# EAGLE board E-book_Reader (EAGLE 9.7.0)
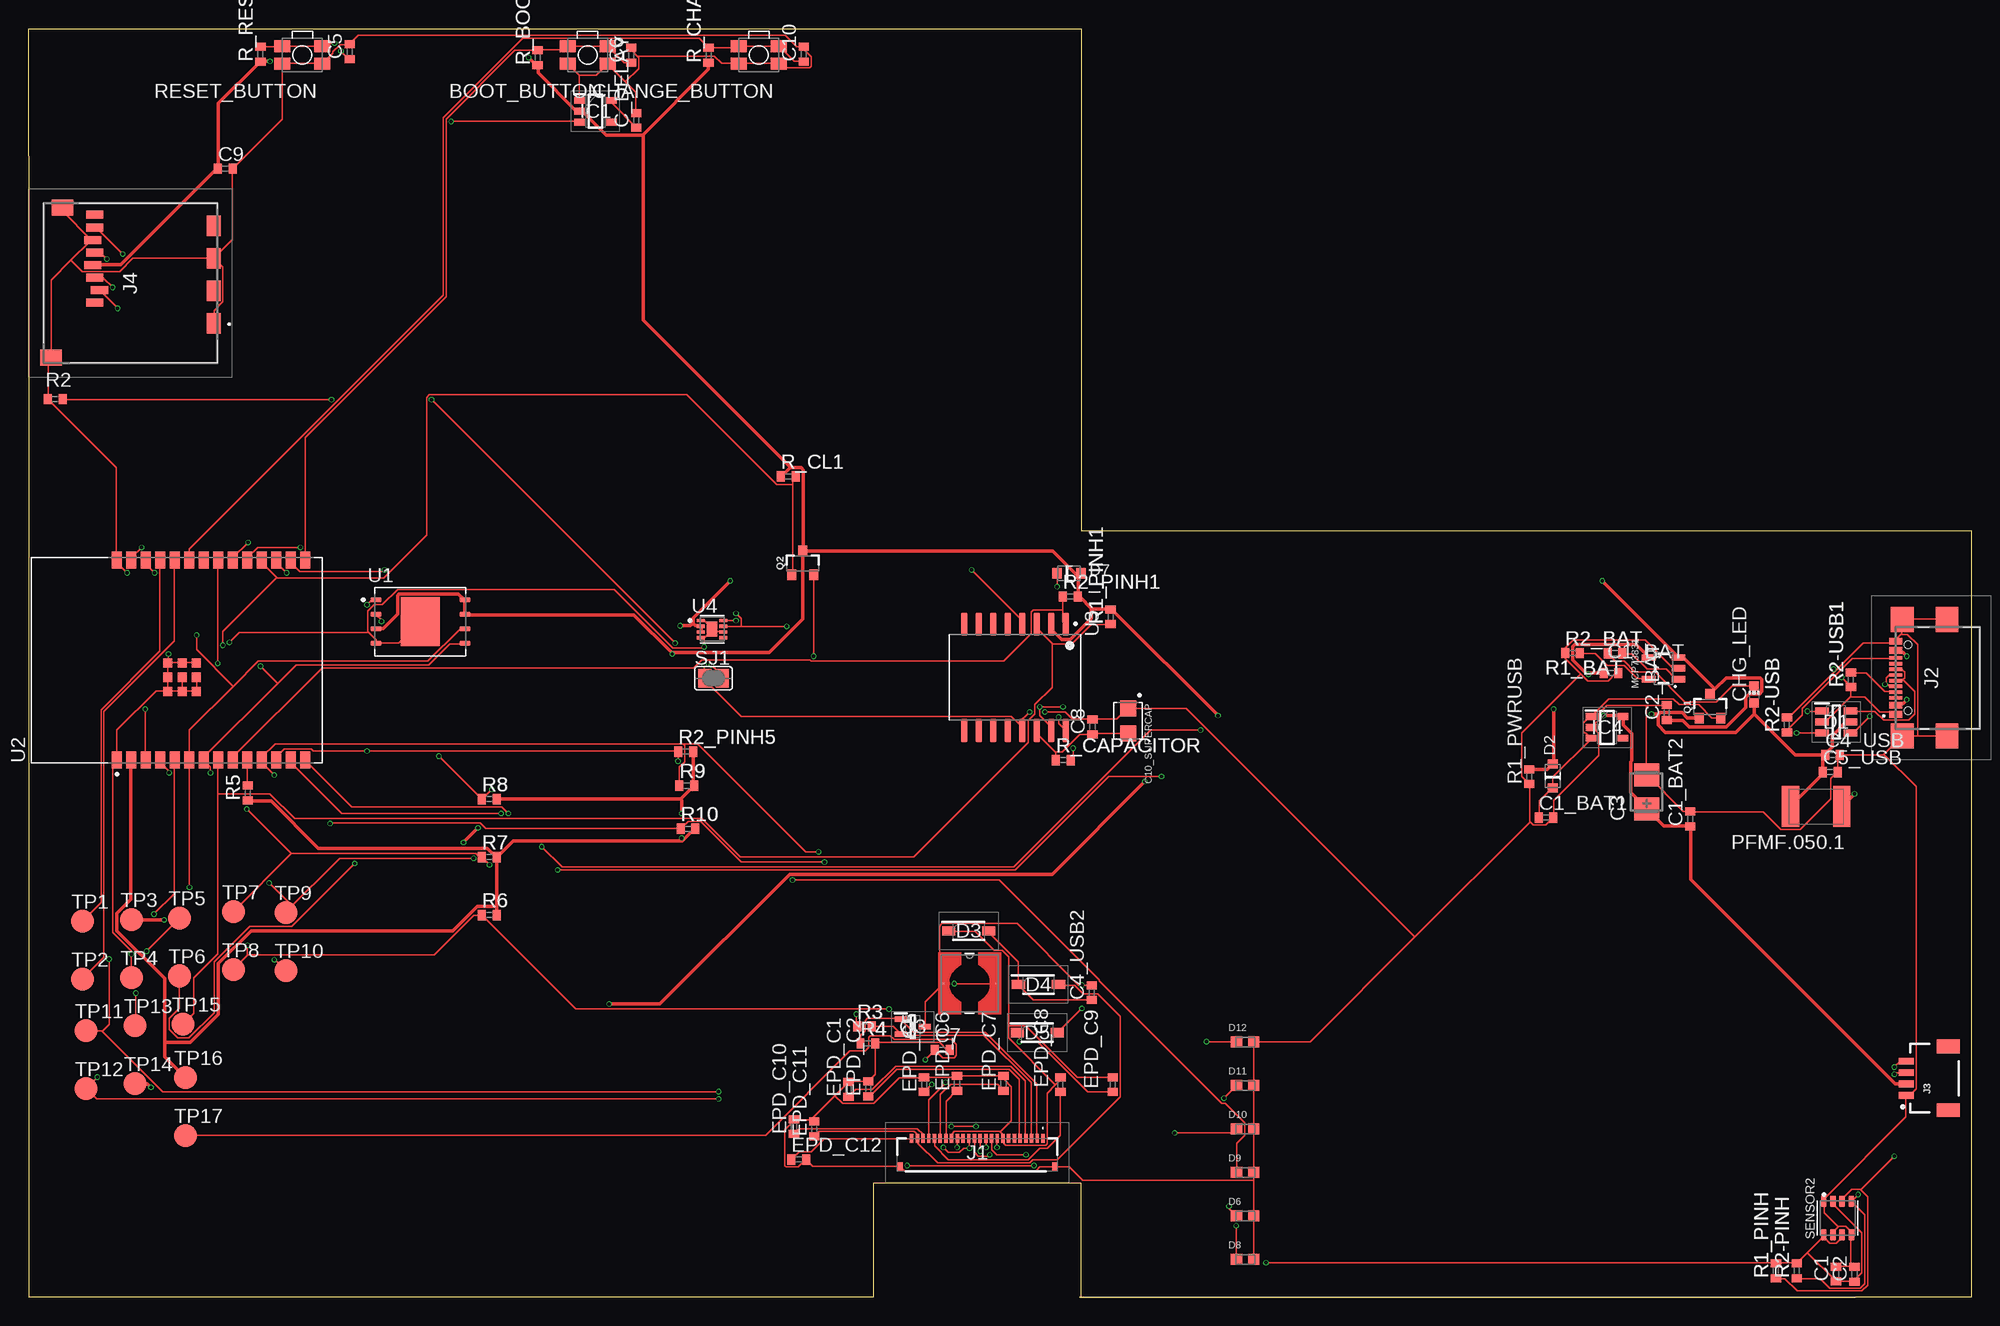
[diagram p0: board, top side]
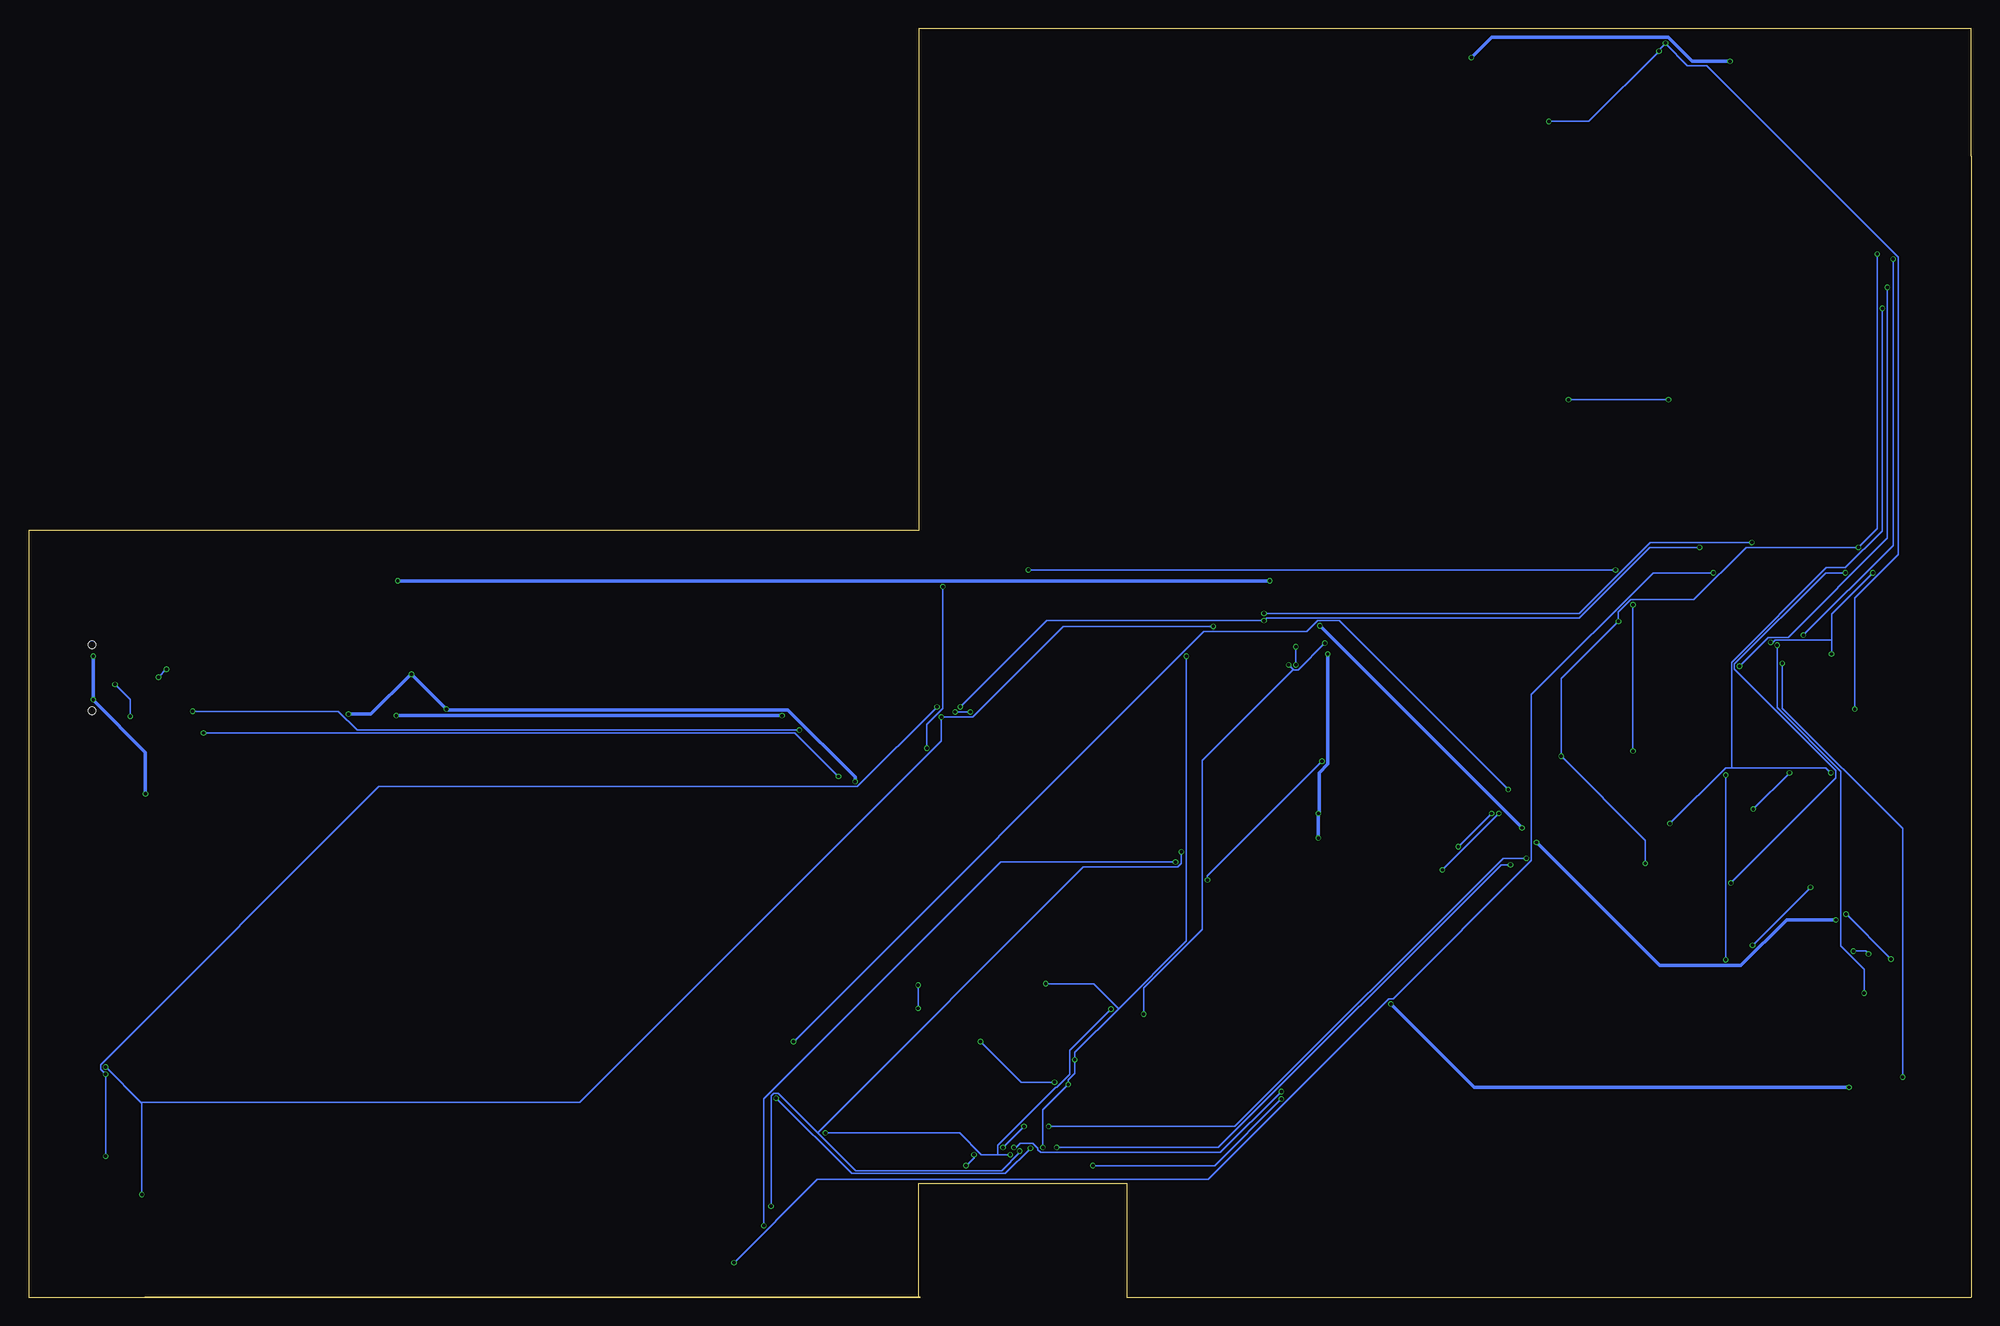
[diagram p1: board, bottom side, seen from below]

Size 170.2 x 111.2 mm. Coordinates in mm from the lower left corner, seen from the top.
Outline: 92.1,0 160,0
Outline: 92.1,0 170.2,0 170.2,67.2 92.2,67.2 92.2,111.2 0,111.2 0,100 0,0 74,0 74,10 92.2,10 92.2,0.1 92.1,0
Copper layers (1*16): Top 0.035mm / dielectric 1.6mm / Bottom 0.035mm
Design rules "jlcpcb-2layers.dru": minimum track width 5mil, minimum drill 0.3mm, track to track 5mil, track to pad 5mil, pad to pad 5mil, via to via 5mil, smd to smd 5mil, copper to edge 0.2mm, drill to drill 6mil, minimum pad ring 10mil, minimum via ring 3mil, stop-mask expansion 4mil, vias tented up to drill 0mil, thermal gap 10mil
Net classes: 1 power: width 0.3 mm

## Footprints (pad centres in the part's own frame; a part is rotated, then mirrored left to right if it is on the bottom)
MYBUTTON = smd 1.4 x 1.05: 1 1.75,0.75; 2 -1.75,0.75; 3 -1.75,-0.75; 4 1.75,-0.75
EAGLE-LTSPICE_C0402 = smd 0.7 x 0.9: 1 -0.65,0; 2 0.65,0
RCL_CT3528 = smd 2 x 2.2: + -1.5,0; - 1.5,0
CAPCP3225X100N = smd 1.4 x 1.4: 1 -1.1,0; 2 1.1,0
ADAFRUIT_CHIP-LED0603 = smd 0.8 x 0.8: A 0,-0.75; C 0,0.75
SOT95P280X145-6N = smd 1.2 x 0.6: 1 -1.25,0.95; 2 -1.25,0; 3 -1.25,-0.95; 4 1.25,-0.95; 5 1.25,0; 6 1.25,0.95
ESP32_WROVER_AVX---SD0805S020S1R0_AVX_SD0805S020S1R0_0 = smd 0.8 x 0.9: 1 -1.05,0; 2 1.05,0
SOD3716X135N = smd 1.15 x 0.8: 1 -1.75,0; 2 1.75,0
DIOC1608X36N = smd 0.97 x 0.94: 1 -0.75,0; 2 0.75,0
SOT95P280X125-5N = smd 0.9 x 0.6: 1 -1.4,0.95; 2 -1.4,0; 3 -1.4,-0.95; 4 1.4,-0.95; 5 1.4,0.95
SOT95P280X120-5N = smd 0.9 x 0.6: 1 -1.4,0.95; 2 -1.4,0; 3 -1.4,-0.95; 4 1.4,-0.95; 5 1.4,0.95
FH34SRJ24S05SH99 = smd 0.3 x 0.8: 1 5.75,1.45; 2 5.25,1.45; 3 4.75,1.45; 4 4.25,1.45; 5 3.75,1.45; 6 3.25,1.45; 7 2.75,1.45; 8 2.25,1.45; 9 1.75,1.45; 10 1.25,1.45; 11 0.75,1.45; 12 0.25,1.45; 13 -0.25,1.45; 14 -0.75,1.45; 15 -1.25,1.45; 16 -1.75,1.45; 17 -2.25,1.45; 18 -2.75,1.45; 19 -3.25,1.45; 20 -3.75,1.45; 21 -4.25,1.45; 22 -4.75,1.45; 23 -5.25,1.45; 24 -5.75,1.45 | smd 0.4 x 0.8: MP1 6.75,-1.05; MP2 -6.75,-1.05
SAMACSYS_PARTS_USB4110GFA = smd 0.3 x 1.15: A1 -3.35,3.678; A4 -2.55,3.678; A5 -1.25,3.678; A6 -0.25,3.678; A7 0.25,3.678; A8 1.25,3.678; A9 2.55,3.678; A12 3.35,3.678; B1 3.05,3.678; B4 2.25,3.678; B5 1.75,3.678; B6 0.75,3.678; B7 -0.75,3.678; B8 -1.75,3.678; B9 -2.25,3.678; B12 -3.05,3.678 | smd 2.18 x 2: MP1 -5.11,-0.827; MP2 5.11,-0.827; MP3 -5.11,3.103; MP4 5.11,3.103 | hole 0.65: -2.89,2.603; 2.89,2.603
JST04_1MM_RA = smd 0.6 x 1.35: 1 -1.5,0; 2 -0.5,0; 3 0.5,0; 4 1.5,0 | smd 1.2 x 2: NC1 2.8,-3.675; NC2 -2.8,-3.675
112ATAARR03ATTEND = smd 1.8 x 1.2: G1 10.6,10.4; G2 4.9,10.4; S1 7.75,10.4; S2 2.05,10.4 | smd 1.4 x 1.9: G3 13.6,-3.85; G4 0.45,-2.85 | smd 0.7 x 1.5: P1 8.8,0; P2 7.7,0.4; P3 6.6,0; P4 5.5,-0.2; P5 4.4,0; P6 3.3,-0.2; P7 2.2,0; P8 1.1,0
IND_4828-WE-TPC_WRE = smd 0.127 x 0.127: 1 -2.286,0; 2 2.286,0
ESP32_WROVER_SPARKFUN-IC-POWER_SOT23-5 = smd 0.55 x 1.2: 1 -0.95,-1.3; 2 0,-1.3; 3 0.95,-1.3; 4 0.95,1.3; 5 -0.95,1.3
ESP32C6_VARISTOR_CT/CN1812 = smd 1.5 x 3.6: 1 -2.25,0; 2 2.25,0
ESP32_WROVER_SPARKFUN-DISCRETESEMI_SOT23-3 = smd 0.8 x 0.9: 1 -0.95,-1; 2 0.95,-1; 3 0,1.1
SOT65P210X110-3N = smd 1.05 x 0.5: 1 -1.05,0.65; 2 -1.05,-0.65; 3 1.05,0
ESP32_WROVER_EAGLE-LTSPICE_R0402 = smd 0.7 x 0.9: 1 -0.65,0; 2 0.65,0
ESP32_WROVER_BME680_PSON80P300X300X100-8N = smd 1.016 x 0.5: 1 1.458,1.2; 2 1.458,0.4; 3 1.458,-0.4; 4 1.458,-1.2; 5 -1.458,-1.22; 6 -1.458,-0.4; 7 -1.458,0.4; 8 -1.458,1.2
SJ = smd 1.168 x 1.6: 1 -0.762,0; 2 0.762,0
TP20R = smd 2 x 2: TP 0,0
SON127P600X800X80-9N = smd 0.94 x 0.44: 1 -3.895,1.905; 2 -3.895,0.635; 3 -3.895,-0.635; 4 -3.895,-1.905; 5 3.895,-1.905; 6 3.895,-0.635; 7 3.895,0.635; 8 3.895,1.905 | smd 3.4 x 4.3: 9 0,0
XCVR_ESP32-C6-WROOM-1-N8 = smd 1.5 x 0.9: 1 -8.75,5.26; 2 -8.75,3.99; 3 -8.75,2.72; 4 -8.75,1.45; 5 -8.75,0.18; 6 -8.75,-1.09; 7 -8.75,-2.36; 8 -8.75,-3.63; 9 -8.75,-4.9; 10 -8.75,-6.17; 11 -8.75,-7.44; 12 -8.75,-8.71; 13 -8.75,-9.98; 14 -8.75,-11.25; 15 8.75,-11.25; 16 8.75,-9.98; 17 8.75,-8.71; 18 8.75,-7.44; 19 8.75,-6.17; 20 8.75,-4.9; 21 8.75,-3.63; 22 8.75,-2.36; 23 8.75,-1.09; 24 8.75,0.18; 25 8.75,1.45; 26 8.75,2.72; 27 8.75,3.99; 28 8.75,5.26 | smd 0.8 x 0.8: 29_1 -2.755,0.79; 29_2 -1.505,0.79; 29_3 -0.255,0.79; 29_4 -2.755,-0.46; 29_5 -1.505,-0.46; 29_6 -0.255,-0.46; 29_7 -2.755,-1.71; 29_8 -1.505,-1.71; 29_9 -0.255,-1.71
SOIC127P1032X265-16N = smd 2.05 x 0.59: 1 -4.655,4.445; 2 -4.655,3.175; 3 -4.655,1.905; 4 -4.655,0.635; 5 -4.655,-0.635; 6 -4.655,-1.905; 7 -4.655,-3.175; 8 -4.655,-4.445; 9 4.655,-4.445; 10 4.655,-3.175; 11 4.655,-1.905; 12 4.655,-0.635; 13 4.655,0.635; 14 4.655,1.905; 15 4.655,3.175; 16 4.655,4.445
SON50P200X200X80-9N = smd 0.76 x 0.27: 1 -0.985,0.75; 2 -0.985,0.25; 3 -0.985,-0.25; 4 -0.985,-0.75; 5 0.985,-0.75; 6 0.985,-0.25; 7 0.985,0.25; 8 0.985,0.75 | smd 0.9 x 1.3: 9 0,0

## Placement (x,y rotation side)
BOOT_BUTTON  BUTTON_CUSYOMV1  [MYBUTTON]  48.98,108.88 180 top
C1  100nF  [EAGLE-LTSPICE_C0402]  158.33,2.05 90 top
C1_BAT  4.7uF  [EAGLE-LTSPICE_C0402]  138.63,54.73 0 top
C1_BAT1  4.7uF  [EAGLE-LTSPICE_C0402]  132.93,42.05 0 top
C1_BAT2  4.7uF  [EAGLE-LTSPICE_C0402]  145.56,41.93 90 top
C2  100nF  [EAGLE-LTSPICE_C0402]  159.95,2.04 90 top
C2_BAT  4.7uF  [EAGLE-LTSPICE_C0402]  143.51,51.25 90 top
C3  100uF TANT  [RCL_CT3528]  141.74,44.3 90 top
C4_USB  100NF  [EAGLE-LTSPICE_C0402]  158.03,47.55 0 top
C4_USB2  4.7uF/25V  [EAGLE-LTSPICE_C0402]  93.13,26.71 90 top
C5  1uF  [EAGLE-LTSPICE_C0402]  28.13,109.16 90 top
C5_USB  4.7uF  [EAGLE-LTSPICE_C0402]  157.83,46.04 0 top
C6  100nF  [EAGLE-LTSPICE_C0402]  52.79,108.85 90 top
C7  10uF  [EAGLE-LTSPICE_C0402]  80.03,21.69 0 top
C8  100nF  [EAGLE-LTSPICE_C0402]  93.2,50 90 top
C9  100nF  [EAGLE-LTSPICE_C0402]  17.23,98.91 0 top
C10  100nF  [EAGLE-LTSPICE_C0402]  67.91,108.95 90 top
C10_SUPERCAP  CPH3225A  [CAPCP3225X100N]  96.32,50.53 270 top
C_DELAY  100nF  [EAGLE-LTSPICE_C0402]  53.23,103.15 90 top
CHANGE_BUTTON  BUTTON_CUSYOMV1  [MYBUTTON]  63.98,108.88 180 top
CHG_LED  [ADAFRUIT_CHIP-LED0603]  151.15,52.85 0 top
D1  USBLC6-2SC6Y  [SOT95P280X145-6N]  158.35,50.43 0 top
D2  ESP32_WROVER_AVX---SD0805S020S1R0_AVX_SD0805S020S1R0_0_0AVX_SD0805S020S1R0_0_0  [ESP32_WROVER_AVX---SD0805S020S1R0_AVX_SD0805S020S1R0_0]  133.53,45.71 90 top
D3  MBR0530  [SOD3716X135N]  82.37,32.13 0 top
D4  MBR0530  [SOD3716X135N]  88.47,27.42 0 top
D5  MBR0530  [SOD3716X135N]  88.37,23.21 0 top
D6  PGB1010603MR  [DIOC1608X36N]  106.57,7.15 0 top
D7  ESP32_WROVER_AVX---SD0805S020S1R0_AVX_SD0805S020S1R0_0_0AVX_SD0805S020S1R0_0_0  [ESP32_WROVER_AVX---SD0805S020S1R0_AVX_SD0805S020S1R0_0]  91.14,63.46 0 top
D8  PGB1010603MR  [DIOC1608X36N]  106.57,3.34 0 top
D9  PGB1010603MR  [DIOC1608X36N]  106.57,10.96 0 top
D10  PGB1010603MR  [DIOC1608X36N]  106.57,14.77 0 top
D11  PGB1010603MR  [DIOC1608X36N]  106.57,18.58 0 top
D12  PGB1010603MR  [DIOC1608X36N]  106.57,22.39 0 top
EPD_C1  1uF/50V  [EAGLE-LTSPICE_C0402]  71.83,18.25 90 top
EPD_C2  1uF/50V  [EAGLE-LTSPICE_C0402]  73.55,18.29 90 top
EPD_C5  1uF/50V  [EAGLE-LTSPICE_C0402]  78.45,18.65 90 top
EPD_C6  1uF/50V  [EAGLE-LTSPICE_C0402]  81.33,18.75 90 top
EPD_C7  1uF/50V  [EAGLE-LTSPICE_C0402]  85.41,18.75 90 top
EPD_C8  1uF/50V  [EAGLE-LTSPICE_C0402]  90.39,18.65 90 top
EPD_C9  1uF/50V  [EAGLE-LTSPICE_C0402]  94.97,18.65 90 top
EPD_C10  1uF/50V  [EAGLE-LTSPICE_C0402]  67.05,14.97 90 top
EPD_C11  1uF/50V  [EAGLE-LTSPICE_C0402]  68.83,14.77 90 top
EPD_C12  1uF/50V  [EAGLE-LTSPICE_C0402]  67.47,12.09 0 top
IC1  BD5229G-TR  [SOT95P280X125-5N]  49.66,103.95 0 top
IC4  XC6220A331MR-G  [SOT95P280X120-5N]  138.28,49.96 0 top
J1  FH34SRJ-24S-0.5SH_99_  [FH34SRJ24S05SH99]  83.11,12.49 0 top
J2  SAMACSYS_PARTS_USB4110-GF-A  [SAMACSYS_PARTS_USB4110GFA]  167.23,54.3 90 top
J3  QWIIC_RIGHT_ANGLE  [JST04_1MM_RA]  164.48,19.21 90 top
J4  112A-TAAR-R03_ATTEND  [112ATAARR03ATTEND]  5.82,95.97 270 top
L1  68uH  [IND_4828-WE-TPC_WRE]  82.44,27.52 0 top
MCP73831  ESP32_WROVER_SPARKFUN-IC-POWER_MCP73831  [ESP32_WROVER_SPARKFUN-IC-POWER_SOT23-5]  143.23,55.13 90 top
PFMF.050.1  ESP32C6_VARISTORCN1812  [ESP32C6_VARISTOR_CT/CN1812]  156.6,43.02 180 top
Q1  20V/4.2A/52mΩ/1.4W  [ESP32_WROVER_SPARKFUN-DISCRETESEMI_SOT23-3]  147.3,51.75 0 top
Q2  20V/4.2A/52mΩ/1.4W  [ESP32_WROVER_SPARKFUN-DISCRETESEMI_SOT23-3]  67.82,64.33 0 top
Q3  SI1308EDL-T1-GE3  [SOT65P210X110-3N]  77.46,23.73 0 top
R1_BAT  200  [ESP32_WROVER_EAGLE-LTSPICE_R0402]  138.97,56.45 180 top
R1_PINH  10K  [ESP32_WROVER_EAGLE-LTSPICE_R0402]  153.07,2.35 90 top
R1_PINH1  10k  [ESP32_WROVER_EAGLE-LTSPICE_R0402]  94.79,59.65 90 top
R1_PWRUSB  100k  [ESP32_WROVER_EAGLE-LTSPICE_R0402]  131.47,45.63 90 top
R2  2.2  [ESP32_WROVER_EAGLE-LTSPICE_R0402]  2.33,78.73 0 top
R2-PINH  10K  [ESP32_WROVER_EAGLE-LTSPICE_R0402]  154.89,2.35 90 top
R2-USB  5k1  [ESP32_WROVER_EAGLE-LTSPICE_R0402]  154.03,50.18 90 top
R2-USB1  5k1  [ESP32_WROVER_EAGLE-LTSPICE_R0402]  159.64,54.13 90 top
R2_BAT  2k  [ESP32_WROVER_EAGLE-LTSPICE_R0402]  135.25,56.47 0 top
R2_PINH1  10k  [ESP32_WROVER_EAGLE-LTSPICE_R0402]  91.25,61.43 0 top
R2_PINH5  10k  [ESP32_WROVER_EAGLE-LTSPICE_R0402]  57.57,47.83 0 top
R3  0.47  [ESP32_WROVER_EAGLE-LTSPICE_R0402]  73.23,23.75 0 top
R4  10K  [ESP32_WROVER_EAGLE-LTSPICE_R0402]  73.53,22.27 0 top
R5  10k  [ESP32_WROVER_EAGLE-LTSPICE_R0402]  19.2,44.2 90 top
R6  10k  [ESP32_WROVER_EAGLE-LTSPICE_R0402]  40.37,33.51 0 top
R7  10k  [ESP32_WROVER_EAGLE-LTSPICE_R0402]  40.37,38.59 0 top
R8  10k  [ESP32_WROVER_EAGLE-LTSPICE_R0402]  40.37,43.67 0 top
R9  10k  [ESP32_WROVER_EAGLE-LTSPICE_R0402]  57.67,44.85 0 top
R10  10k  [ESP32_WROVER_EAGLE-LTSPICE_R0402]  57.77,41.07 0 top
R_BOOT  10K  [ESP32_WROVER_EAGLE-LTSPICE_R0402]  44.59,108.65 90 top
R_CAPACITOR  15  [ESP32_WROVER_EAGLE-LTSPICE_R0402]  90.65,47.09 0 top
R_CHANGE  10K  [ESP32_WROVER_EAGLE-LTSPICE_R0402]  59.57,108.85 90 top
R_CL1  10K  [ESP32_WROVER_EAGLE-LTSPICE_R0402]  66.55,71.95 0 top
R_RESET  10K  [ESP32_WROVER_EAGLE-LTSPICE_R0402]  20.31,108.95 90 top
RESET_BUTTON  BUTTON_CUSYOMV1  [MYBUTTON]  23.98,108.88 180 top
SENSOR2  ESP32_WROVER_BME680_BME680  [ESP32_WROVER_BME680_PSON80P300X300X100-8N]  158.47,6.96 90 top
SJ1  [SJ]  60,54.26 0 top
TP1  TPTP20R  [TP20R]  4.74,32.98 0 top
TP2  TPTP20R  [TP20R]  4.74,27.9 0 top
TP3  TPTP20R  [TP20R]  9.04,33.12 0 top
TP4  TPTP20R  [TP20R]  9.04,28.04 0 top
TP5  TPTP20R  [TP20R]  13.24,33.26 0 top
TP6  TPTP20R  [TP20R]  13.24,28.18 0 top
TP7  TPTP20R  [TP20R]  17.94,33.8 0 top
TP8  TPTP20R  [TP20R]  17.94,28.72 0 top
TP9  TPTP20R  [TP20R]  22.54,33.74 0 top
TP10  TPTP20R  [TP20R]  22.54,28.66 0 top
TP11  TPTP20R  [TP20R]  5.04,23.38 0 top
TP12  TPTP20R  [TP20R]  5.04,18.3 0 top
TP13  TPTP20R  [TP20R]  9.34,23.82 0 top
TP14  TPTP20R  [TP20R]  9.34,18.74 0 top
TP15  TPTP20R  [TP20R]  13.54,23.96 0 top
TP16  TPTP20R  [TP20R]  13.74,19.28 0 top
TP17  TPTP20R  [TP20R]  13.74,14.2 0 top
U1  W25Q512JVEIQ  [SON127P600X800X80-9N]  34.32,59.23 0 top
U2  ESP32-C6-WROOM-1-N8  [XCVR_ESP32-C6-WROOM-1-N8]  12.99,55.86 90 top
U3  DS3231SN#  [SOIC127P1032X265-16N]  86.42,54.35 270 top
U4  MAX17048G+T10  [SON50P200X200X80-9N]  59.88,58.57 0 top

## Library data of the parts
BOOT_BUTTON CHANGE_BUTTON CHG_LED PFMF.050.1 RESET_BUTTON SJ1 TP1-TP17 = DeskAssistant v19 v1
C1 C1_BAT C1_BAT1 C1_BAT2 C2 C2_BAT C4_USB C4_USB2 C5 C5_USB C6-C10 C_DELAY EPD_C1 EPD_C2 EPD_C5-EPD_C12 = DeskAssistant v19 v1; SPICEMODEL: NONE; SPICEPREFIX: C
C3 = DeskAssistant v19 v1; SPICEPREFIX: C
C10_SUPERCAP = DeskAssistant v19 v1; AVAILABILITY: Not in stock; CHECK_PRICES: https://www.snapeda.com/parts/CPH3225A/Seiko+Instruments/view-part/?ref=eda; DESCRIPTION: 11 mF (EDLC) Supercapacitor 3.3 V 1210 (3225 Metric) - -; MF: Seiko Instruments; MP: CPH3225A; PACKAGE: 1210 Seiko; PRICE: None; PURCHASE-URL: https://www.snapeda.com/api/url_track_click_mouser/?unipart_id=562593&manufacturer=Seiko Instruments&part_name=CPH3225A&search_term=None; SNAPEDA_LINK: https://www.snapeda.com/parts/CPH3225A/Seiko+Instruments/view-part/?ref=snap
D1 = DeskAssistant v19 v1; AVAILABILITY: In Stock; CHECK_PRICES: https://www.snapeda.com/parts/USBLC6-2SC6Y/STMicroelectronics/view-part/?ref=eda; DESCRIPTION: 17V Clamp 5A (8/20µs) Ipp Tvs Diode Surface Mount SOT-23-6; MF: STMicroelectronics; MP: USBLC6-2SC6Y; PACKAGE: SOT-23-6 STMicroelectronics; PRICE: None; SNAPEDA_LINK: https://www.snapeda.com/parts/USBLC6-2SC6Y/STMicroelectronics/view-part/?ref=snap
D2 D7 = DeskAssistant v19 v1; CENTROID_NOT_SPECIFIED: No; DATASHEET: http://datasheets.avx.com/schottky.pdf; DIGIKEY_DESCRIPTION: DIODE SCHOTTKY 20V 1A 0805; DIGIKEY_PART_NUMBER: 478-7800-1-ND; LEAD_FREE: yes; MF: AVX; MOUSER_PART_NUMBER: 581-SD0805S020S1R0; PACKAGE: 0805 (2012 metric); PREFIX: D; ROHS: yes; TEMPERATURE_RANGE_HIGH: +125°C; TEMPERATURE_RANGE_LOW: -55°C
D3-D5 = DeskAssistant v19 v1; AVAILABILITY: In Stock; CHECK_PRICES: https://www.snapeda.com/parts/MBR0530/Onsemi/view-part/?ref=eda; DESCRIPTION: Diode Schottky 30 V 500mA Surface Mount SOD-123; MF: ON Semiconductor; MP: MBR0530; PACKAGE: SOD-123-2 ON Semiconductor; PRICE: None; PURCHASE-URL: https://www.snapeda.com/api/url_track_click_mouser/?unipart_id=179458&manufacturer=ON Semiconductor&part_name=MBR0530&search_term=None; SNAPEDA_LINK: https://www.snapeda.com/parts/MBR0530/Onsemi/view-part/?ref=snap
D6 D8-D12 = DeskAssistant v19 v1; AVAILABILITY: In Stock; CHECK_PRICES: https://www.snapeda.com/parts/PGB1010603MR/Littelfuse/view-part/?ref=eda; DESCRIPTION: 150V (Typ) Clamp - Ipp Tvs Diode Surface Mount 0603 (1608 Metric); MF: Littelfuse Inc.; MP: PGB1010603MR; PACKAGE: 0603 Littelfuse Inc.; PRICE: None; PURCHASE-URL: https://www.snapeda.com/api/url_track_click_mouser/?unipart_id=5659453&manufacturer=Littelfuse Inc.&part_name=PGB1010603MR&search_term=None; SNAPEDA_LINK: https://www.snapeda.com/parts/PGB1010603MR/Littelfuse/view-part/?ref=snap
IC1 = DeskAssistant v19 v1; DESCRIPTION: Voltage Detector with Adjustable Delay Time: CMOS processes are utilized to develop high precision, low current consumption CMOS reset ICs that allow arbitrary setting of the delay time. The extensive lineup includes both Nch Open Drain and CMOS output types in a wide range of detection voltages (from 2.3V to 6.0V, in 0.1V steps), enabling selection of the ideal solution based on customer requirements. In addition, the entire series is of course both lead-free and RoHS-compliant.; HEIGHT: 1.25mm; MANUFACTURER_NAME: ROHM Semiconductor; MANUFACTURER_PART_NUMBER: BD5229G-TR; MOUSER_PART_NUMBER: 755-BD5229G-TR; MOUSER_PRICE-STOCK: https://www.mouser.co.uk/ProductDetail/ROHM-Semiconductor/BD5229G-TR?qs=4kLU8WoGk0vvnhrrYwdszw%3D%3D
IC4 = DeskAssistant v19 v1; DESCRIPTION: LDO Voltage Regulators; HEIGHT: 1.2mm; MANUFACTURER_NAME: Torex; MANUFACTURER_PART_NUMBER: XC6220A331MR-G; MOUSER_PART_NUMBER: 865-XC6220A331MR-G; MOUSER_PRICE-STOCK: https://www.mouser.co.uk/ProductDetail/Torex-Semiconductor/XC6220A331MR-G?qs=AsjdqWjXhJ8ZSWznL1J0gg%3D%3D
J1 = DeskAssistant v19 v1; DESCRIPTION: 24 Position FFC, FPC Connector Contacts, Top and Bottom 0.020" (0.50mm) Surface Mount, Right Angle; HEIGHT: 1.1mm; MANUFACTURER_NAME: Hirose; MANUFACTURER_PART_NUMBER: FH34SRJ-24S-0.5SH(99); MOUSER_PART_NUMBER: 798-FH34SRJ24S05SH99; MOUSER_PRICE-STOCK: https://www.mouser.co.uk/ProductDetail/Hirose-Connector/FH34SRJ-24S-0.5SH99?qs=vcbW%252B4%252BSTIpKBl5ap9J8Fw%3D%3D
J2 = DeskAssistant v19 v1; DESCRIPTION: CONN USB 2.0 TYPE-C R/A SMT; HEIGHT: 3.26mm; MANUFACTURER_NAME: GCT (GLOBAL CONNECTOR TECHNOLOGY); MANUFACTURER_PART_NUMBER: USB4110-GF-A; MOUSER_PART_NUMBER: 640-USB4110-GF-A; MOUSER_PRICE-STOCK: https://www.mouser.co.uk/ProductDetail/GCT/USB4110-GF-A?qs=KUoIvG%2F9IlYiZvIXQjyJeA%3D%3D
J3 = DeskAssistant v19 v1; PROD_ID: CONN-13694
J4 = DeskAssistant v19 v1; DESCRIPTION: Micro SD Card Socket, Push-Push Type, Top Mount, SMT, H=1.83mm, 10u; HEIGHT: 1.9mm; MANUFACTURER_NAME: ATTEND; MANUFACTURER_PART_NUMBER: 112A-TAAR-R03 ATTEND
L1 = DeskAssistant v19 v1; COPYRIGHT: Copyright (C) 2024 Ultra Librarian. All rights reserved.; MANUFACTURER_PART_NUMBER: 744043680; MFR_NAME: Wurth Electronics
MCP73831 = DeskAssistant v19 v1; PROD_ID: IC-09995
Q1 Q2 = DeskAssistant v19 v1; PROD_ID: TRAN-14388
Q3 = DeskAssistant v19 v1; AVAILABILITY: In Stock; CHECK_PRICES: https://www.snapeda.com/parts/SI1308EDL-T1-GE3/Vishay+Siliconix/view-part/?ref=eda; DESCRIPTION: Si1308EDL-T1-GE3 N-channel MOSFET Transistor, 1.5 A, 30 V, 3-Pin SC-70 | Siliconix / Vishay SI1308EDL-T1-GE3; MF: Vishay Siliconix; MP: SI1308EDL-T1-GE3; PACKAGE: SOT-323 Vishay Semiconductor; PRICE: None; PURCHASE-URL: https://www.snapeda.com/api/url_track_click_mouser/?unipart_id=274603&manufacturer=Vishay Siliconix&part_name=SI1308EDL-T1-GE3&search_term=None; SNAPEDA_LINK: https://www.snapeda.com/parts/SI1308EDL-T1-GE3/Vishay+Siliconix/view-part/?ref=snap
R1_BAT R1_PINH R1_PINH1 R1_PWRUSB R2 R2-PINH R2-USB R2-USB1 R2_BAT R2_PINH1 R2_PINH5 R3-R10 R_BOOT R_CAPACITOR R_CHANGE R_CL1 R_RESET = DeskAssistant v19 v1; SPICEMODEL: NONE; SPICEPREFIX: R
SENSOR2 = DeskAssistant v19 v1; AVAILABILITY: Unavailable; DESCRIPTION: Integrated Environmental Unit; MF: Bosch Sensortec; MP: BME680; PACKAGE: LGA-8 Bosch Tools; PRICE: None
U1 = DeskAssistant v19 v1; AVAILABILITY: In Stock; CHECK_PRICES: https://www.snapeda.com/parts/W25Q512JVEIQ/Winbond+Electronics/view-part/?ref=eda; DESCRIPTION: FLASH - NOR Memory IC 512Mb (64M x 8) SPI - Quad I/O 133 MHz 8-WSON (8x6); MF: Winbond Electronics; MP: W25Q512JVEIQ; PACKAGE: Package; PRICE: None; SNAPEDA_LINK: https://www.snapeda.com/parts/W25Q512JVEIQ/Winbond+Electronics/view-part/?ref=snap
U2 = DeskAssistant v19 v1; AVAILABILITY: In Stock; CHECK_PRICES: https://www.snapeda.com/parts/ESP32-C6-WROOM-1-N8/Espressif+Systems/view-part/?ref=eda; DESCRIPTION: Multiprotocol Modules ESP32-C6 module, Wi-Fi 6 in 2.4 GHz band, Bluetooth 5, Zigbee 3.0 and Thread. ESP34-WROOM Compatible - ENGINEERING SAMPLE; MF: Espressif Systems; MP: ESP32-C6-WROOM-1-N8; PACKAGE: None; PRICE: None; SNAPEDA_LINK: https://www.snapeda.com/parts/ESP32-C6-WROOM-1-N8/Espressif+Systems/view-part/?ref=snap
U3 = DeskAssistant v19 v1; AVAILABILITY: In Stock; CHECK_PRICES: https://www.snapeda.com/parts/DS3231SN%23/Analog+Devices/view-part/?ref=eda; DESCRIPTION: Extremely Accurate I²C-Integrated RTC/TCXO/Crystal; MF: Analog Devices; MP: DS3231SN#; PACKAGE: SOIC-16 Maxim; PRICE: None; PURCHASE-URL: https://www.snapeda.com/api/url_track_click_mouser/?unipart_id=99048&manufacturer=Analog Devices&part_name=DS3231SN#&search_term=None; SNAPEDA_LINK: https://www.snapeda.com/parts/DS3231SN%23/Analog+Devices/view-part/?ref=snap
U4 = DeskAssistant v19 v1; AVAILABILITY: In Stock; CHECK_PRICES: https://www.snapeda.com/parts/MAX17048G+T10/Analog+Devices/view-part/?ref=eda; DESCRIPTION: 3µA 1-Cell/2-Cell Fuel Gauge with ModelGauge; MF: Analog Devices; MP: MAX17048G+T10; PACKAGE: TDFN-8 Maxim; PRICE: None; PURCHASE-URL: https://www.snapeda.com/api/url_track_click_mouser/?unipart_id=329239&manufacturer=Analog Devices&part_name=MAX17048G+T10&search_term=None; SNAPEDA_LINK: https://www.snapeda.com/parts/MAX17048G+T10/Analog+Devices/view-part/?ref=snap

## Nets
3V3 [power]: C1_BAT2.1 C3.+ C9.1 D7.2 IC1.2 IC4.5 J3.2 J4.P4 Q2.3 R1_PINH1.2 R2_PINH1.2 R2_PINH5.2 R5.1 R6.2 R7.2 R8.2 R9.2 R10.2 R_BOOT.1 R_CHANGE.1 R_CL1.1 R_RESET.1 TP16.TP U1.3 U1.7 U1.8 U2.2 U3.2
32KHZ: R2_PINH1.1 U2.9 U3.1
DN: D1.4 J2.A7 J2.B7
DP: D1.6 J2.A6 J2.B6
EPD_3V3: C7.1 EPD_C5.1 J1.15 J1.16 L1.2 Q2.2 TP17.TP
EPD_3V3_C: Q2.1 R_CL1.2 TP13.TP U2.18
EPD_BUSY: J1.9 TP9.TP U2.26
EPD_CS: D6.1 J1.12 R9.1 TP10.TP U2.11
EPD_DC: J1.11 TP11.TP U2.5
EPD_RST: J1.10 TP12.TP U2.21
FLASH_CS: D9.1 R2_PINH5.1 U1.1 U2.12
GDR: J1.2 Q3.1 R4.1
GND: BOOT_BUTTON.1 BOOT_BUTTON.2 C1.2 C1_BAT1.2 C1_BAT2.2 C1_BAT.2 C2.2 C2_BAT.2 C3.- C4_USB.2 C5.2 C5_USB.2 C6.2 C7.2 C8.2 C9.2 C10.2 C10_SUPERCAP.1 C_DELAY.2 CHANGE_BUTTON.1 CHANGE_BUTTON.2 D1.2 D3.1 D6.2 D8.2 D9.2 D10.2 D11.2 D12.2 EPD_C1.2 EPD_C2.2 EPD_C5.2 EPD_C6.2 EPD_C7.2 EPD_C8.2 EPD_C9.2 EPD_C10.2 EPD_C11.2 EPD_C12.2 IC1.1 IC4.2 J1.8 J1.17 J1.MP1 J1.MP2 J2.A1 J2.A12 J2.B1 J2.B12 J2.MP1 J2.MP2 J2.MP3 J2.MP4 J3.1 J4.G1 J4.G2 J4.G3 J4.G4 J4.P6 MCP73831.2 R1_PWRUSB.1 R2-USB1.1 R2-USB.2 R2.1 R2_BAT.1 R4.2 RESET_BUTTON.1 RESET_BUTTON.2 SENSOR2.1 SENSOR2.5 SENSOR2.7 SJ1.1 TP4.TP TP5.TP U1.4 U1.9 U2.1 U2.28 U2.29_1 U2.29_2 U2.29_3 U2.29_4 U2.29_5 U2.29_6 U2.29_7 U2.29_8 U2.29_9 U3.13 U4.1 U4.4 U4.6 U4.9
GPIO8: R5.2 U2.10
I2C_PW: C1.1 C2.1 R1_PINH.2 R2-PINH.2 SENSOR2.2 SENSOR2.6 SENSOR2.8 U2.17
INT_RTC: R1_PINH1.1 TP15.TP U2.8 U3.3
IO/BOOT: BOOT_BUTTON.3 BOOT_BUTTON.4 C6.1 R_BOOT.2 U2.15
IO/CHANGE: C10.1 CHANGE_BUTTON.3 CHANGE_BUTTON.4 R_CHANGE.2 U2.23
MISO: D12.1 J4.P7 R8.1 TP6.TP U1.2 U2.27
MOSI: D11.1 J1.14 J4.P3 R7.1 TP7.TP U1.5 U2.7
N$1: J2.B5 R2-USB.1
N$3: MCP73831.1 R1_BAT.1
N$4: J2.A5 R2-USB1.2
N$5: EPD_C12.1 J1.24
N$6: EPD_C8.1 J1.20
N$7: EPD_C10.1 J1.22
N$10: EPD_C7.1 J1.19
N$12: C1_BAT1.1 D2.1 IC4.1 IC4.3 Q1.2
N$13: EPD_C6.1 J1.18
N$17: C4_USB2.1 D3.2 D4.1
N$25: CHG_LED.C R1_BAT.2
N$27: MCP73831.5 R2_BAT.2
N$37: EPD_C1.1 J1.4
N$38: EPD_C2.1 J1.5
N$46: C_DELAY.1 IC1.5
N$50: D7.1 R_CAPACITOR.2
PREVGH: D5.1 EPD_C9.1 J1.21
PREVGL: D4.2 EPD_C11.1 J1.23
RESE: J1.3 Q3.2 R3.2
RESE': R2.2 R3.1 SJ1.2
RESET: C5.1 IC1.3 R_RESET.2 RESET_BUTTON.3 RESET_BUTTON.4 U2.3
RTC_RST: U2.16 U3.4
RX: TP2.TP U2.24
SCK: D10.1 J1.13 J4.P5 R6.1 TP8.TP U1.6 U2.6
SCL: J3.4 R2-PINH.1 SENSOR2.4 U2.20 U3.16 U4.7
SDA: J3.3 R1_PINH.1 SENSOR2.3 U2.19 U3.15 U4.8
SRC: C4_USB2.2 D5.2 L1.1 Q3.3
SS_SD: D8.1 J4.P2 R10.1 U2.4
TX: TP1.TP U2.25
USB_D+: D1.1 U2.14
USB_D-: D1.3 U2.13
VBAT [power]: C2_BAT.1 MCP73831.3 Q1.3 TP3.TP U4.2 U4.3
VBUS [power]: C1_BAT.1 C4_USB.1 C5_USB.1 CHG_LED.A D1.5 D2.2 MCP73831.4 PFMF.050.1.2 Q1.1 R1_PWRUSB.2 TP14.TP
VRTC: C8.1 C10_SUPERCAP.2 R_CAPACITOR.1 U3.14
VUSB [power]: J2.A4 J2.A9 J2.B4 J2.B9 PFMF.050.1.1

## Tracks (layer width: path | path; a pad name or v marks a point on that pad's centre or on a via)
3V3  (via drill 0.3)
  Top 0.3: 11.94,22.35 11.94,21.08 TP16.TP | 11.94,22.35 11.94,27.94 7.75,32.13 7.75,33.66 8.95,34.86 8.95,47.05 U2.2 | 57.15,43.69 41.02,43.69 R8.2 | 57.15,43.69 58.29,44.83 R9.2 58.23,44.96 58.23,47.82 R2_PINH5.2 | 41.02,34.29 41.02,38.54 R7.2 | 41.02,34.29 41.02,33.53 R6.2 | R5.1 19.24,43.5 21.27,43.5 25.4,39.37 40.2,39.37 40.89,38.67 R7.2 | 57.37,40.1 57.28,40.01 42.48,40.01 41.15,38.67 R7.2 | 57.37,40.1 58.29,41.02 58.42,41.02 R10.2 | v57.21,42.42 57.21,43.56 57.15,43.69 | v57.21,40.26 57.37,40.1 | 11.94,22.35 14.16,22.35 16.64,24.83 16.64,29.27 19.49,32.13 37.15,32.13 39.31,34.29 41.02,34.29 | J3.2 164.47,18.73 163.51,18.73 145.61,36.64 145.61,41.15 C1_BAT2.1 145.54,41.34 143.26,41.34 141.8,42.8 C3.+ 141.67,42.93 140.34,44.26 140.34,46.93 140.46,47.05 140.46,49.4 139.7,50.16 139.7,50.86 IC4.5 139.57,50.99 v137.99,50.99 | J4.P4 5.65,90.49 8.06,90.49 16.45,98.87 C9.1 16.64,98.93 16.64,104.65 20.26,108.27 R_RESET.1 20.45,108.33 v21.14,108.33 | 53.78,101.85 59.56,107.63 59.56,108.14 R_CHANGE.1 | 53.78,101.85 50.61,101.85 48.58,103.89 48.39,103.89 IC1.2 48.26,104.01 47.94,104.01 44.64,107.31 44.64,107.95 R_BOOT.1 44.45,108.01 v43.81,108.65 | U1.3 30.48,58.61 31.05,58.61 32.32,59.88 32.32,61.53 32.45,61.66 37.66,61.66 38.16,61.15 U1.8 38.23,61.02 38.23,59.88 U1.7 38.35,59.82 53.02,59.82 56.33,56.52 | 66.74,72.71 66.04,72.01 65.91,72.01 R_CL1.1 | 66.74,72.71 67.69,72.71 67.88,72.52 67.88,65.47 Q2.3 | 93.15,60.33 94.74,60.33 R1_PINH1.2 94.93,60.26 v104.2,50.99 | 93.15,60.33 92.08,61.4 R2_PINH1.2 91.95,61.47 91.95,63.25 92.14,63.44 D7.2 91.82,63.31 89.72,65.41 68.01,65.41 Q2.3
  Top 0.3: U3.2 89.6,58.99 89.6,58.55 90.49,57.66 91.25,57.66 93.09,59.5 93.09,60.2 93.15,60.33 | 56.33,56.52 64.9,56.52 67.82,59.44 67.82,65.28 Q2.3 | 53.78,101.85 53.85,101.73 53.85,85.66 66.67,72.83 66.74,72.71 | v56.39,56.39 56.33,56.52
  Bottom 0.3: v57.21,40.26 v57.21,42.42 57.15,42.55 57.15,45.97 56.39,46.74 v56.39,56.39 | v21.14,108.33 24.45,108.33 26.54,110.43 42.04,110.43 v43.81,108.65 | v104.2,50.99 v137.99,50.99
32KHZ
  Top 0.127: 90.61,60.26 90.61,59.24 90.81,59.05 U3.1 | 90.61,60.26 90.61,61.4 R2_PINH1.1 | 90.61,60.26 88.01,60.26 87.82,60.07 87.82,58.17 85.41,55.75 68.58,55.75 68.45,55.88 58.99,55.88 58.29,55.18 25.72,55.18 17.91,47.37 17.91,47.12 U2.9
DN  (via drill 0.3)
  Top 0.127: 162.75,53.85 163,53.59 163.51,53.59 J2.B7 | 162.75,53.85 162.75,54.29 163,54.55 163.51,54.55 J2.A7 | v161.29,50.93 159.89,49.53 159.64,49.53 D1.4 | 162.75,53.85 v162.62,53.72
  Bottom 0.127: v161.29,50.93 161.29,52.39 v162.62,53.72
DP
  Top 0.127: 164.18,54.13 164.34,54.29 164.34,54.8 164.15,54.99 163.58,54.99 J2.B6 | 164.18,54.13 164.15,54.1 163.58,54.1 J2.A6 | 164.18,54.13 165.23,53.09 165.23,51.12 164.72,50.61 162.5,50.61 161.73,51.37 159.64,51.37 D1.6
EPD_3V3  (via drill 0.3)
  Top 0.127: J1.15 81.85,13.97 81.41,13.97 J1.16 81.34,13.91 v81.34,13.14 | v79.12,18.67 78.49,18.03 EPD_C5.1 | v78.55,20.83 79.38,21.65 C7.1 79.44,21.65 80.07,21.02 81.09,21.02 81.28,21.21 81.28,22.16 80.83,22.61 75.82,22.61 75.5,22.92 73.72,22.92 73.6,22.8 73.6,21.91 73.28,21.59 71.94,21.59 64.58,14.22 13.78,14.22 TP17.TP | v68.77,56.2 68.77,63.31 Q2.2 | v81.09,27.5 84.71,27.5 L1.2
  Bottom 0.127: v68.77,56.2 68.77,31.24 74.71,25.3 | 74.71,25.3 78.55,21.46 v78.55,20.83 78.55,19.62 79.12,19.05 v79.12,18.67 81.34,16.45 v81.34,13.14 | v81.09,27.5 76.9,27.5 74.71,25.3
EPD_3V3_C  (via drill 0.3)
  Top 0.127: 66.93,71.25 66.93,71.69 67.18,71.94 R_CL1.2 | 66.93,71.25 66.93,63.37 Q2.1 | 21.75,63.09 21.78,63.06 31.11,63.06 34.86,66.8 34.86,78.87 35.12,79.12 57.66,79.12 65.53,71.25 66.93,71.25 | 21.75,63.09 20.45,64.39 20.45,64.58 U2.18 | v9.4,26.67 9.4,23.88 TP13.TP | v17.02,57.15 17.02,58.36 21.75,63.09
  Bottom 0.127: v9.4,26.67 9.4,28.77 11.43,30.8 11.43,46.1 17.02,51.69 v17.02,57.15
EPD_BUSY  (via drill 0.3)
  Top 0.127: v84.84,13.14 84.84,13.91 J1.9 | v80.83,14.99 v83,14.99 | v38.99,38.48 27.24,38.48 22.54,33.78 TP9.TP 23.05,34.35 v21.08,36.32 | v11.05,63.5 10.29,64.26 10.29,64.58 U2.26
  Bottom 0.127: v83,14.99 v84.84,13.14 | v80.83,14.99 64.52,14.99 41.02,38.48 v38.99,38.48 | v11.05,63.5 12.76,63.5 20.77,55.5 20.77,55.05 11.87,46.16 11.87,45.53 v21.08,36.32
EPD_CS  (via drill 0.3)
  Top 0.127: v83.38,12.83 83.38,13.91 J1.12 | v105.16,8 105.16,7.81 105.79,7.18 D6.1 | 57.37,48.48 57.34,48.51 21.59,48.51 20.45,47.37 20.45,47.12 U2.11 20.45,47.05 20.45,46.86 v21.53,45.78 | 57.37,48.48 57.47,48.39 57.47,46.93 57.02,46.48 57.02,44.9 R9.1 | v21.53,29.59 21.59,29.59 22.48,28.7 TP10.TP | v69.22,39.05 68.07,39.05 58.61,48.51 57.4,48.51 57.37,48.48
  Bottom 0.127: v83.38,12.83 83.38,12.7 84.96,11.11 97.73,11.11 101.06,14.45 | 101.06,14.45 104.52,17.91 104.9,17.91 105.16,17.65 v105.16,8 | v21.53,45.78 v21.53,29.59 | 101.06,14.45 77.79,37.72 69.53,37.72 69.22,38.04 v69.22,39.05
EPD_DC  (via drill 0.3)
  Top 0.127: v83.88,13.14 83.88,13.91 J1.11 | v60.45,18.03 11.75,18.03 6.45,23.34 | 6.45,23.34 6.41,23.37 5.08,23.37 TP11.TP | v10.99,33.59 12.76,35.37 12.76,47.05 U2.5 | v7.05,29.65 7.05,23.94 6.45,23.34
  Bottom 0.127: v83.88,13.14 83.69,13.14 83.31,13.53 82.23,13.53 81.79,13.08 81.79,12.95 81.53,12.7 65.79,12.7 v60.45,18.03 | v7.05,29.65 v10.99,33.59
EPD_RST  (via drill 0.3)
  Top 0.127: v87.38,12.51 84.84,12.51 84.39,12.95 84.39,13.91 J1.10 | v76.96,11.56 v88.08,11.56 | v60.45,17.4 5.97,17.4 5.08,18.29 TP12.TP 5.08,18.35 v6.03,19.3 | v16.57,55.56 16.57,64.58 U2.21
  Bottom 0.127: v87.38,12.51 87.38,12.26 v88.08,11.56 | v76.96,11.56 66.29,11.56 v60.45,17.4 | v16.57,55.56 16.57,51.63 6.03,41.08 v6.03,19.3
FLASH_CS  (via drill 0.3)
  Top 0.127: U2.12 21.72,47.12 21.72,47.37 22.42,48.07 24.77,48.07 24.96,47.88 v29.65,47.88 56.9,47.88 R2_PINH5.1 56.9,47.82 v56.9,46.99 | v29.65,60.71 30.04,61.09 30.42,61.09 U1.1 | v66.93,36.58 85.03,36.58 93.79,27.81 93.79,27.75 104.52,17.02 104.84,17.02 106.55,15.3 106.55,14.22 105.86,13.53 105.86,10.99 D9.1
  Bottom 0.127: v29.65,47.88 v29.65,60.71 | v66.93,36.58 66.93,36.96 v56.9,46.99
GDR
  Top 0.127: J1.2 88.33,13.97 88.33,18.73 83.82,23.24 77.53,23.24 76.45,24.32 Q3.1 76.39,24.38 76.33,24.45 73.47,24.45 73.28,24.26 73.28,23.37 72.9,22.99 72.9,22.29 R4.1
GND  (via drill 0.3)
  Top 0.127: 85.12,14.51 85.34,14.29 85.34,13.97 J1.8 85.41,13.91 85.41,13.53 85.6,13.34 89.09,13.34 89.22,13.46 89.22,17.91 89.95,18.64 | 85.12,14.51 85.09,14.54 81.09,14.54 80.9,14.35 80.9,13.97 J1.17 | 89.95,18.64 90.36,19.05 90.36,19.24 EPD_C8.2 | 85.88,23.78 85.85,23.75 85.85,22.73 89.95,18.64 | 85.88,23.78 85.92,23.81 87.38,23.81 91.89,19.3 94.93,19.3 EPD_C9.2 | D3.1 80.64,32.07 82.93,32.07 84.58,30.42 85.28,30.42 85.85,29.84 85.85,23.81 85.88,23.78 | 85.12,14.51 86.11,15.49 86.11,18.48 85.47,19.11 85.47,19.37 EPD_C7.2 85.41,19.43 81.34,19.43 EPD_C6.2 81.28,19.37 81.22,19.3 78.49,19.3 EPD_C5.2 78.42,19.24 76.26,19.24 74.04,17.02 71.31,17.02 70.64,17.68 | C7.2 80.64,21.72 80.45,21.72 79.82,22.35 74.3,22.35 74.23,22.29 R4.2 74.17,22.23 74.17,19.56 EPD_C2.2 73.53,18.92 71.88,18.92 EPD_C1.2 71.82,18.86 70.64,17.68 | 70.64,17.68 68.71,15.75 68.71,15.56 EPD_C11.2 68.77,15.43 68.64,15.56 67.06,15.56 EPD_C10.2 67.06,15.49 66.23,14.67 66.23,11.56 66.36,11.43 67.44,11.43 68.07,12.06 EPD_C12.2 68.14,12.06 68.71,11.49 76.33,11.49 J1.MP2 76.39,11.43 76.71,11.11 88.27,11.11 88.58,11.43 J1.MP1 89.92,11.43 91.19,11.43 92.33,10.29 107.31,10.29 | D8.2 107.31,3.37 107.31,7.11 D6.2 107.31,7.18 107.31,10.29 | 107.31,10.29 107.31,10.92 D9.2 107.31,10.99 107.31,14.73 D10.2 107.31,14.8 107.31,18.54 D11.2 107.31,18.61 107.31,22.35 D12.2 107.38,22.42 112.27,22.42 121.44,31.59 | 135.99,54.64 134.62,56.01 134.62,56.45 R2_BAT.1 134.62,56.52 134.62,56.9 135.32,57.59 141.6,57.59 144.02,55.18 144.53,55.18 MCP73831.2 | 135.99,54.64 136.59,54.04 138.37,54.04 139,54.67 139.26,54.67 C1_BAT.2
  Top 0.127: 131.54,41.69 131.83,41.4 132.91,41.4 133.54,42.04 C1_BAT1.2 133.6,42.1 133.6,43.56 137.54,47.5 137.54,49.4 136.97,49.97 IC4.2 136.91,49.97 137.35,50.42 137.41,50.42 137.54,50.55 137.54,51.18 138.24,51.88 141.73,51.88 | 131.54,41.69 131.51,41.72 131.51,44.96 R1_PWRUSB.1 131.44,45.02 130.81,45.66 130.81,49.47 135.99,54.64 | 141.73,51.88 143.51,51.88 C2_BAT.2 | 141.73,51.88 141.73,45.85 C3.- 141.8,45.78 144.97,42.61 145.54,42.61 C1_BAT2.2 145.61,42.55 151.96,42.55 153.48,41.02 155.19,41.02 157.86,43.69 157.86,45.47 158.43,46.04 C5_USB.2 158.5,46.1 158.5,47.37 158.62,47.5 C4_USB.2 158.69,47.56 162.5,47.56 162.53,47.59 | 159.64,2.73 159.89,2.73 C2.2 159.64,2.73 | 159.64,2.73 158.37,2.73 C1.2 | 158.53,6.19 158.56,6.22 159.19,6.22 159.64,5.78 159.64,5.52 SENSOR2.5 159.64,5.46 159.64,2.73 | 158.53,6.19 158.12,5.78 158.12,5.52 SENSOR2.7 | 158.53,6.19 157.29,7.43 157.29,8.38 SENSOR2.1 157.29,8.45 157.29,8.64 164.47,15.81 164.47,17.65 J3.1 164.53,17.72 164.78,17.72 165.35,18.29 165.35,44.77 162.53,47.59 | 162.53,47.59 164.08,49.15 J2.MP3 164.15,49.21 165.48,49.21 | 165.48,49.21 168.02,49.21 J2.MP1 | J2.A1 163.58,50.99 163.58,51.24 J2.B12 163.51,51.31 162.18,51.31 160.84,52.64 159.64,52.64 159.61,52.67 | 159.61,52.67 157.42,50.48 157.16,50.48 D1.2 | 159.61,52.67 159.64,52.7 159.64,53.47 R2-USB1.1 159.64,53.53 v158.81,54.36 | 158.27,54.9 160.72,57.34 163.51,57.34 J2.B1 163.58,57.4 163.58,57.59 J2.A12 163.58,57.66 164.05,58.13 | 158.27,54.9 154.24,50.86 154.05,50.86 R2-USB.2 | 164.05,58.13 164.08,58.17 164.08,59.37 J2.MP4 164.15,59.44 168.02,59.44 J2.MP2
  Top 0.127: 158.27,54.9 v158.12,55.05 | 165.48,49.21 165.48,57.21 164.59,58.1 164.08,58.1 164.05,58.13 | 131.54,41.69 121.44,31.59 | U1.9 34.29,59.18 32.45,57.34 30.48,57.34 U1.4 30.48,57.4 30.48,57.59 29.75,58.33 | 59.18,57.85 59.24,57.85 59.82,58.42 59.82,58.55 U4.9 | 59.18,57.85 58.93,57.85 U4.4 59.18,57.85 | U4.6 60.83,58.36 59.82,58.36 U4.9 | U4.1 58.93,59.31 59.18,59.31 59.88,58.61 U4.9 | 86.71,50.32 87,50.04 87,49.72 U3.13 | 86.71,50.32 86.11,50.93 62.42,50.93 59.24,54.1 59.24,54.23 SJ1.1 59.18,54.29 v59.18,55.44 | 59.18,57.85 v59.18,57.02 59.05,56.9 56.45,56.9 51.31,62.04 32.32,62.04 30.99,60.71 30.29,60.71 29.72,60.13 29.72,58.36 29.75,58.33 | v89.03,51.31 90.81,51.31 91.44,50.67 93.15,50.67 C8.2 93.22,50.67 95.31,50.67 96.27,51.63 C10_SUPERCAP.1 101.41,51.63 121.44,31.59 | 86.71,50.32 v87.69,51.31 | 62.23,108.14 65.72,108.14 CHANGE_BUTTON.2 65.79,108.08 66.1,107.76 68.45,107.76 68.58,107.89 68.58,108.71 67.94,109.35 67.94,109.54 C10.2 67.88,109.6 67.31,109.6 66.29,110.62 28.89,110.62 28.13,109.86 C5.2 28.07,109.79 27.3,109.79 26.67,109.16 26.67,109.03 25.78,108.14 RESET_BUTTON.2 25.72,108.14 22.29,108.14 RESET_BUTTON.1 22.23,108.08 22.23,103.25 17.91,98.93 C9.2 17.84,98.87 17.84,92.71 16.26,91.12 J4.G2 | IC1.1 48.26,107.06 48.23,107.09 | 48.23,107.09 47.24,108.08 BOOT_BUTTON.1 | 52.29,106.52 50.74,108.08 BOOT_BUTTON.2 49.72,107.12 48.26,107.12 48.23,107.09 | 52.29,106.52 53.21,105.6 53.21,103.82 C_DELAY.2 | 53.37,108.74 53.47,108.65 53.47,107.7 52.29,106.52 | 53.37,108.74 52.83,109.28 52.83,109.47 C6.2 | 62.23,108.14 60.71,108.14 60.07,108.78 53.4,108.78 53.37,108.74
  Top 0.127: 62.23,108.14 CHANGE_BUTTON.1 | J4.G1 16.26,85.41 16.26,86.49 17.02,87.25 17.02,90.3 16.26,91.06 J4.G2 | U2.29_3 12.26,55.63 13.4,55.63 U2.29_6 13.46,55.63 14.67,55.63 U2.29_9 | U2.29_8 14.73,54.29 14.73,53.15 U2.29_7 14.67,53.15 13.53,53.15 U2.29_4 | U2.29_1 12.19,53.15 12.19,54.29 U2.29_2 12.19,54.42 12.19,55.56 U2.29_3 | U2.29_4 13.46,53.15 13.46,54.29 U2.29_5 | U2.29_1 12.26,53.15 13.4,53.15 U2.29_4 | U2.29_1 12.13,53.15 11.18,53.15 7.75,49.72 7.75,47.12 U2.1 7.68,47.05 7.37,46.74 7.37,32 9.02,30.35 v9.02,30.1 9.02,28.07 TP4.TP | v10.35,30.35 13.21,33.21 TP5.TP | J4.G4 2.98,95.5 2.98,95.19 5.46,92.71 5.59,92.71 J4.P6 5.4,92.71 5.4,92.58 3.71,90.9 | 3.71,90.9 1.97,89.15 1.97,82.42 J4.G3 1.91,82.36 1.71,82.17 1.71,78.74 R2.1 1.71,78.68 7.68,72.71 7.68,64.64 U2.28 7.75,64.58 7.75,64.39 v8.64,63.5 | v12.26,56.39 12.26,55.69 U2.29_3 | 3.71,90.9 4.7,89.92 8,89.92 9.14,91.06 16.19,91.06 J4.G2 | v17.59,57.4 18.48,58.29 29.72,58.29 29.75,58.33
  Bottom 0.127: v158.12,55.05 v158.81,54.36 | v59.18,55.44 v59.18,57.02 | v87.69,51.31 v89.03,51.31 | v10.35,30.35 9.27,30.35 v9.02,30.1 | 12.26,57.59 12.26,59.88 v8.64,63.5 | 12.26,57.59 v12.26,56.39 | v17.59,57.4 17.4,57.4 17.21,57.59 12.26,57.59
GPIO8
  Top 0.127: R5.2 19.18,44.9 19.18,47.05 U2.10
I2C_PW  (via drill 0.3)
  Top 0.127: SENSOR2.2 158.12,8.38 158.12,8.13 160.59,5.65 160.59,2.16 159.89,1.46 C2.1 159.89,1.4 158.37,1.4 C1.1 158.31,1.46 155.83,3.94 | SENSOR2.6 158.81,5.46 158.81,5.21 158.37,4.76 157.8,4.76 157.29,5.27 157.29,5.46 SENSOR2.8 157.29,5.21 157.1,5.21 155.83,3.94 | v22.61,63.5 21.72,64.39 21.72,64.58 U2.17 | v108.39,3.05 153.03,3.05 R1_PINH.2 153.1,3.05 154.88,3.05 R2-PINH.2 154.94,3.05 155.83,3.94
  Bottom 0.127: v22.61,63.5 27.88,63.5 38.54,52.83 38.54,38.29 50.67,26.16 51.05,26.16 66.86,10.35 101.09,10.35 v108.39,3.05
INT_RTC
  Top 0.127: 89.69,57.31 88.33,58.67 88.33,58.99 U3.3 | 89.69,57.31 89.72,57.28 91.38,57.28 93.09,58.99 94.74,58.99 R1_PINH1.1 | 16.57,44.13 16.57,30.1 14.48,28 14.48,24.89 13.59,24 TP15.TP | 16.57,44.13 16.57,47.05 U2.8 | 16.57,44.13 21.14,44.13 23.3,41.97 58.99,41.97 62.36,38.61 77.53,38.61 87.57,48.64 87.57,50.55 88.14,51.12 88.14,51.94 89.66,53.47 89.66,57.28 89.69,57.31
IO/BOOT
  Top 0.127: C6.1 52.77,108.2 52.2,108.2 50.74,109.67 BOOT_BUTTON.3 50.67,109.67 47.24,109.67 BOOT_BUTTON.4 47.18,109.6 46.93,109.35 44.64,109.35 R_BOOT.2 44.58,109.28 42.61,109.28 36.58,103.25 36.58,87.69 24.26,75.37 24.26,64.64 U2.15
IO/CHANGE
  Top 0.127: C10.1 67.88,108.33 67.06,108.33 65.79,109.6 CHANGE_BUTTON.3 65.72,109.67 62.23,109.67 CHANGE_BUTTON.4 62.23,109.6 62.17,109.54 59.63,109.54 R_CHANGE.2 59.56,109.54 58.74,110.36 43.31,110.36 36.32,103.38 36.32,87.82 14.1,65.6 14.1,64.64 U2.23
MISO  (via drill 0.3)
  Top 0.127: v35.94,47.43 39.69,43.69 R8.1 39.75,43.69 v40.58,44.51 | v30.92,59.24 30.92,59.37 30.48,59.82 U1.2 | v103.19,22.42 105.79,22.42 D12.1 | v9.91,65.72 9.02,64.83 9.02,64.64 U2.27 | v8.26,91.44 5.97,93.73 5.84,93.73 J4.P7 | v28.57,38.04 23.05,32.51 19.37,32.51 16.26,29.4 16.26,24.96 14.03,22.73 13.08,22.73 12.32,23.5 12.32,24.45 13.21,25.34 13.21,28.13 TP6.TP
  Bottom 0.127: v103.19,22.42 67.25,58.36 58.23,58.36 57.28,59.31 55.37,59.31 v40.58,44.51 | v8.26,91.44 8.26,67.37 v9.91,65.72 19.75,65.72 24.32,61.15 29.84,61.15 30.92,60.07 v30.92,59.24 35.94,54.23 v35.94,47.43 28.57,40.07 v28.57,38.04
MOSI  (via drill 0.3)
  Top 0.127: v104.71,17.46 105.79,18.54 D11.1 | J1.14 82.42,13.91 v82.42,13.08 81.92,13.08 81.53,12.7 80.58,12.7 v80.14,13.14 | 23.02,38.89 17.97,33.85 TP7.TP | 23.02,38.89 23.05,38.92 39.18,38.92 39.5,38.61 39.69,38.61 R7.1 39.75,38.54 v40.39,37.91 | 21.81,53.82 15.37,47.37 15.37,47.12 U2.7 15.37,47.05 15.94,46.48 v15.94,45.97 | 21.81,53.82 23.43,55.44 35.05,55.44 36.89,57.28 38.16,57.28 U1.5 | v7.37,88.52 6.54,89.34 5.84,89.34 J4.P3 | 21.81,53.82 v20.32,55.31 | v19.11,42.8 23.02,38.89
  Bottom 0.127: v82.42,13.08 84.64,10.86 98.11,10.86 v104.71,17.46 | v7.37,88.52 7.37,66.55 16.07,57.85 17.78,57.85 v20.32,55.31 | v15.94,45.97 v19.11,42.8 | v80.14,13.14 65.98,13.14 41.21,37.91 v40.39,37.91
N$1
  Top 0.127: R2-USB.1 154.05,49.53 154.05,49.72 155.38,51.05 155.38,51.63 159.77,56.01 163.51,56.01 J2.B5
N$3
  Top 0.127: R1_BAT.1 139.64,56.39 140.46,56.39 141.8,55.05 143.45,55.05 144.27,54.23 144.53,54.23 MCP73831.1
N$4
  Top 0.127: R2-USB1.2 159.7,54.74 160.97,54.74 162.62,53.09 163.51,53.09 J2.A5
N$5
  Top 0.127: J1.24 77.34,13.91 69.72,13.91 68.58,12.76 67.5,12.76 66.86,12.13 EPD_C12.1
N$6
  Top 0.127: J1.20 79.38,13.91 79.38,13.27 80.58,12.06 87.57,12.06 88.58,13.08 89.22,13.08 90.36,14.22 90.36,17.97 EPD_C8.1
N$7
  Top 0.127: J1.22 78.36,13.97 78.36,14.29 77.85,14.8 67.5,14.8 67.06,14.35 EPD_C10.1
N$10
  Top 0.127: J1.19 79.88,13.97 79.88,17.78 80.77,18.67 84.9,18.67 85.41,18.16 EPD_C7.1
N$12
  Top 0.127: C1_BAT1.1 132.33,42.1 132.33,43.5 133.48,44.64 D2.1 133.54,44.7 133.54,45.59 136.91,48.96 IC4.3 136.84,49.02 136.4,49.47 136.33,49.47 136.21,49.59 136.21,50.35 136.72,50.86 136.84,50.86 IC4.1 136.91,50.93 138.43,52.45 144.08,52.45 144.59,51.94 146.3,51.94 147.45,50.8 148.21,50.8 Q1.2
N$13
  Top 0.127: J1.18 80.39,13.97 80.39,17.21 81.28,18.1 EPD_C6.1
N$17
  Top 0.127: C4_USB2.1 93.09,26.1 88.01,26.1 86.74,27.37 D4.1 86.68,27.43 86.68,29.4 84.14,31.94 84.14,32.07 D3.2
N$25
  Top 0.127: CHG_LED.C 151.13,53.59 149.22,53.59 147.83,52.2 145.1,52.2 142.49,54.8 140.72,54.8 139.76,55.75 139,55.75 138.37,56.39 R1_BAT.2
N$27
  Top 0.127: R2_BAT.2 135.95,56.45 137.22,56.45 138.3,55.37 139.76,55.37 140.91,54.23 141.92,54.23 MCP73831.5
N$37
  Top 0.127: J1.4 87.31,13.97 87.31,18.99 86.04,20.26 75.95,20.26 73.91,18.22 72.45,18.22 71.88,17.65 EPD_C1.1
N$38
  Top 0.127: J1.5 86.81,13.97 86.81,19.11 85.92,20 76.07,20 73.72,17.65 73.6,17.65 EPD_C2.1
N$46
  Top 0.127: IC1.5 51.12,104.84 51.12,104.65 53.21,102.55 C_DELAY.1
N$50  (via drill 0.3)
  Top 0.127: v90.11,62.29 90.11,63.44 D7.1 | v91.5,48.13 91.5,47.31 91.31,47.12 R_CAPACITOR.2
  Bottom 0.127: v90.11,62.29 90.11,51.63 91.5,50.23 v91.5,48.13
PREVGH  (via drill 0.3)
  Top 0.127: v80.33,18.86 80.33,18.8 78.87,17.34 78.87,13.97 J1.21 | D5.1 86.68,23.18 86.81,23.05 v86.81,22.42 88.39,22.42 92.77,18.03 94.93,18.03 EPD_C9.1
  Bottom 0.127: v80.33,18.86 83.25,18.86 v86.81,22.42
PREVGL
  Top 0.127: EPD_C11.1 68.83,14.16 69.22,14.54 77.6,14.54 77.85,14.29 77.85,13.97 J1.23 77.92,13.91 77.92,13.53 79.63,11.81 87.69,11.81 87.95,12.06 90.11,12.06 95.63,17.59 95.63,24.64 93.66,26.61 92.39,26.61 91.63,27.37 90.23,27.37 D4.2
RESE
  Top 0.127: J1.3 87.82,13.97 87.82,18.86 83.69,22.99 76.52,22.99 76.45,23.05 Q3.2 76.39,23.11 75.75,23.75 73.91,23.75 R3.2
RESE'  (via drill 0.3)
  Top 0.127: v26.54,78.68 2.98,78.68 R2.2 | v56.64,57.34 v35.31,78.68 | v59.82,55.44 60.71,54.55 60.71,54.29 SJ1.2 | v72.52,24.83 72.52,23.81 R3.1
  Bottom 0.127: v35.31,78.68 v26.54,78.68 | v56.64,57.34 58.99,54.99 59.37,54.99 59.4,55.02 | v59.82,55.44 59.4,55.02 | v72.52,24.83 72.52,27.11 67.37,32.26 67.37,47.05 59.4,55.02
RESET  (via drill 0.3)
  Top 0.127: R_RESET.2 22.23,109.6 RESET_BUTTON.4 22.29,109.67 25.72,109.67 RESET_BUTTON.3 25.78,109.67 26.04,109.92 v26.8,109.92 | v27.37,109.22 28.07,108.52 C5.1 | v37.02,103.06 48.26,103.06 IC1.3 | v10.22,51.56 10.22,47.12 U2.3
  Bottom 0.127: v37.02,103.06 33.53,103.06 v27.37,109.22 27.37,109.35 v26.8,109.92 26.8,109.86 24.89,107.95 23.18,107.95 6.41,91.19 6.41,65.09 10.22,61.28 v10.22,51.56
RTC_RST  (via drill 0.3)
  Top 0.127: v31.18,63.75 31.05,63.63 23.75,63.63 22.99,64.39 22.99,64.58 U2.16 | v82.61,63.75 87,59.37 87,59.05 U3.4
  Bottom 0.127: v82.61,63.75 v31.18,63.75
RX
  Top 0.127: U2.24 12.76,64.58 12.76,57.53 6.6,51.37 6.6,29.78 4.76,27.94 TP2.TP
SCK  (via drill 0.3)
  Top 0.127: 17.94,53.56 14.1,49.72 14.1,47.12 U2.6 14.1,47.05 v14.1,35.94 | 17.94,53.56 20.13,55.75 34.99,55.75 37.78,58.55 38.16,58.55 U1.6 | v6.86,91 6.29,91.57 5.84,91.57 J4.P5 | v14.73,58.04 14.73,56.77 17.94,53.56 | v84.2,12.51 84.07,12.38 83.19,12.38 82.87,12.7 82.87,13.91 J1.13 | v100.39,14.41 105.47,14.41 105.79,14.73 D10.1 | 19.21,30 17.97,28.77 TP8.TP | 19.21,30 19.24,30.04 35.56,30.04 38.99,33.47 39.69,33.47 R6.1 39.75,33.47 47.94,25.27 v75.37,25.27 | v19.18,30.86 19.18,30.04 19.21,30
  Bottom 0.127: v6.86,91 6.86,65.91 v14.73,58.04 | 85.28,12.51 86.74,12.51 88.65,14.41 v100.39,14.41 | 85.28,12.51 v84.2,12.51 | 85.28,12.51 85.28,13.34 80.2,18.41 80.14,18.41 78.99,19.56 78.99,21.65 v75.37,25.27 | v19.18,30.86 v14.1,35.94
SCL  (via drill 0.3)
  Top 0.127: R2-PINH.1 154.94,1.65 156.97,1.65 157.8,0.83 160.46,0.83 160.84,1.21 160.84,7.24 159.7,8.38 SENSOR2.4 159.7,8.45 v160.27,9.02 | v163.45,20.19 163.96,20.7 164.47,20.7 J3.4 | v66.42,58.8 62.42,58.8 | 62.42,58.8 60.9,58.8 U4.7 | v90.23,50.86 90.23,50.29 90.81,49.72 U3.16 | v19.24,66.17 17.91,64.83 17.91,64.64 U2.20 | v61.98,59.94 62.42,59.5 62.42,58.8
  Bottom 0.127: 160.31,17.05 160.27,17.02 v160.27,9.02 | 160.31,17.05 v163.45,20.19 | v66.42,58.8 79.57,58.8 87.5,50.86 v90.23,50.86 90.23,48.77 121.92,17.08 160.27,17.08 160.31,17.05 | v19.24,66.17 28.13,66.17 34.35,59.94 v61.98,59.94
SDA  (via drill 0.3)
  Top 0.127: 160.5,9.43 160.46,9.46 159.7,9.46 158.88,8.64 158.88,8.45 SENSOR2.3 | 160.5,9.43 161.1,8.83 161.1,1.08 160.59,0.57 154.94,0.57 153.86,1.65 153.1,1.65 R1_PINH.1 | v163.45,19.56 163.58,19.68 164.47,19.68 J3.3 | 160.5,9.43 v163.45,12.38 | v61.98,59.31 60.9,59.31 U4.8 | U3.15 89.53,49.72 89.53,50.04 88.58,50.99 v88.58,51.75 v90.61,51.75 | v23.81,65.72 20.07,65.72 19.18,64.83 19.18,64.64 U2.19
  Bottom 0.127: v163.45,12.38 v163.45,19.56 163.89,20 163.89,20.38 139.51,44.77 97.6,44.77 v90.61,51.75 | v88.58,51.75 81.03,59.31 v61.98,59.31 61.72,59.56 34.35,59.56 28.19,65.72 v23.81,65.72
SRC  (via drill 0.3)
  Top 0.127: C4_USB2.2 93.09,27.37 v92.27,27.37 92.01,27.37 86.61,32.77 80.01,32.77 79.82,32.58 79.82,27.88 80.14,27.56 L1.1 80.14,27.5 78.55,25.91 78.55,23.75 Q3.3 | v92.27,25.34 90.17,23.24 D5.2
  Bottom 0.127: v92.27,27.37 v92.27,25.34
SS_SD  (via drill 0.3)
  Top 0.127: v26.42,41.53 26.48,41.59 39.56,41.59 40.07,41.08 57.09,41.08 R10.1 57.15,41.08 57.78,41.72 58.86,41.72 62.42,38.16 v69.72,38.16 | v12.32,45.97 12.32,46.1 11.56,46.86 11.56,47.05 U2.4 | v105.79,6.29 105.79,3.37 D8.1 | v7.81,86.68 J4.P2
  Bottom 0.127: v26.42,41.53 21.53,46.42 21.02,46.42 | 21.02,46.42 12.76,46.42 v12.32,45.97 | v105.79,6.29 105.79,17.4 85.03,38.16 v69.72,38.16 | v7.81,86.68 7.81,67.18 11.05,63.94 12.7,63.94 21.02,55.63 21.02,46.42
TX
  Top 0.127: U2.25 11.49,64.58 11.49,56.64 6.35,51.5 6.35,34.61 4.76,33.02 TP1.TP
USB_D+  (via drill 0.3)
  Top 0.127: v155.83,51.37 D1.1 | v102.68,49.72 98.3,49.72 86.3,37.72 46.74,37.72 v44.96,39.5 | v42.04,42.42 41.47,42.99 28.32,42.99 24.26,47.05 U2.14
  Bottom 0.127: v155.83,51.37 143.06,51.37 141.41,49.72 v102.68,49.72 | v42.04,42.42 v44.96,39.5
USB_D-  (via drill 0.3)
  Top 0.127: v154.88,49.47 157.1,49.47 D1.3 | v99.25,45.66 94.61,45.66 86.42,37.47 v46.35,37.47 | v41.4,42.42 27.43,42.42 22.99,46.86 22.99,47.05 U2.13
  Bottom 0.127: v154.88,49.47 103.06,49.47 v99.25,45.66 | v41.4,42.42 v46.35,37.47
VBAT  (via drill 0.3)
  Top 0.3: 147.73,53.31 147.32,52.9 Q1.3 | 147.73,53.31 148.72,54.29 151.7,54.29 151.83,54.17 151.83,53.09 151.64,52.9 150.75,52.9 150.43,52.58 150.43,51.69 148.72,49.97 145.48,49.97 144.91,50.55 143.51,50.55 C2_BAT.1 | U4.3 58.93,58.36 58.93,58.8 U4.2 58.8,58.86 58.42,58.86 58.23,59.05 | 58.23,59.05 58.23,59.56 v61.47,62.8 | v137.86,62.8 144.53,56.13 MCP73831.3 144.65,56.01 145.03,56.01 147.73,53.31 | v11.87,33.08 9.08,33.08 TP3.TP | v39.37,41.15 v38.1,39.88 | v57.09,58.86 57.98,58.86 58.1,58.99 58.23,59.05
  Bottom 0.3: v137.86,62.8 v61.47,62.8 | v11.87,33.08 16.19,33.08 20.19,29.08 27.3,29.08 v38.1,39.88 | v57.09,58.86 v39.37,41.15
VBUS  (via drill 0.3)
  Top 0.3: 151.19,51.12 151.19,52.07 CHG_LED.A | 151.19,51.12 154.75,47.56 157.35,47.56 C4_USB.1 | 142.75,51.05 142.94,51.24 144.84,51.24 145.29,50.8 146.3,50.8 Q1.1 | 142.75,51.05 142.75,50.16 143.38,49.53 149.54,49.53 151.07,51.05 151.19,51.12 | C4_USB.1 157.16,47.43 157.16,46.1 C5_USB.1 157.23,45.91 154.37,43.05 PFMF.050.1.2 | D1.5 159.58,50.42 159.19,50.42 157.99,49.21 157.99,48.26 157.42,47.69 C4_USB.1 | R1_PWRUSB.2 131.51,46.29 133.03,46.29 133.48,46.74 D2.2 133.6,46.86 v133.6,51.56 | 136.65,54.74 136.4,54.74 135.25,55.88 135.25,57.02 135.45,57.21 140.84,57.21 141.92,56.13 MCP73831.4 | 136.65,54.74 137.92,54.74 C1_BAT.1 | v136.65,54.61 136.65,54.74 | v10.73,18.41 10.41,18.73 9.4,18.73 TP14.TP | v50.86,25.72 55.31,25.72 66.67,37.08 89.66,37.08 v97.79,45.21 | v142.18,51.12 142.62,51.12 142.75,51.05
  Bottom 0.3: v10.73,18.41 43.56,18.41 v50.86,25.72 | v97.79,45.21 97.79,45.59 103.69,51.5 133.48,51.5 v133.6,51.56 v136.65,54.61 136.78,54.55 140.21,51.12 v142.18,51.12
VRTC
  Top 0.127: C10_SUPERCAP.2 96.27,49.4 93.22,49.4 C8.1 93.15,49.34 92.08,49.34 90.55,47.82 89.98,47.82 89.95,47.78 | 89.95,47.78 88.33,49.4 88.33,49.66 U3.14 | 89.95,47.78 89.98,47.75 89.98,47.12 R_CAPACITOR.1
VUSB  (via drill 0.3)
  Top 0.3: J2.A4 163.58,51.75 163.58,52.01 J2.B9 163.7,52.07 164.21,52.07 v164.53,52.39 | J2.A9 163.58,56.83 163.58,56.58 J2.B4 163.7,56.52 164.21,56.52 v164.53,56.2 | v159.96,44.13 158.88,43.05 PFMF.050.1.1
  Bottom 0.3: v164.53,56.2 v164.53,52.39 164.47,52.26 159.96,47.75 v159.96,44.13